# Altium PCB Christmas-2023_Soundboard.PcbDoc
Units mil, origin at the board's own origin, x right, y up, seen from the top; angles counter-clockwise.
Board outline 6800 x 3400 mil, 2 copper layers (Top Layer, Bottom Layer); 187 components, 122 nets, 548 pads, 0 vias.
Unrouted connection lines stored in the file: 360.
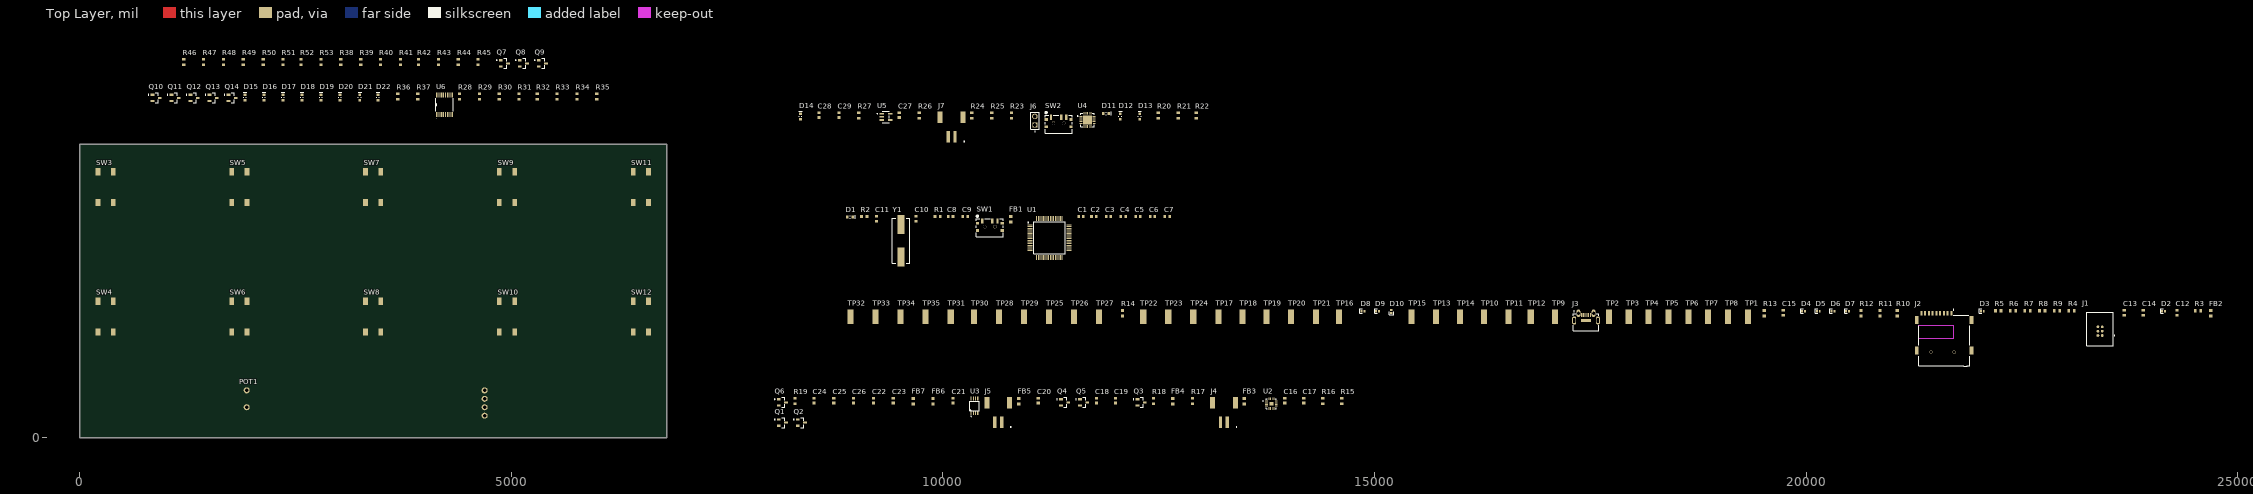
[diagram p0: Top Layer view]
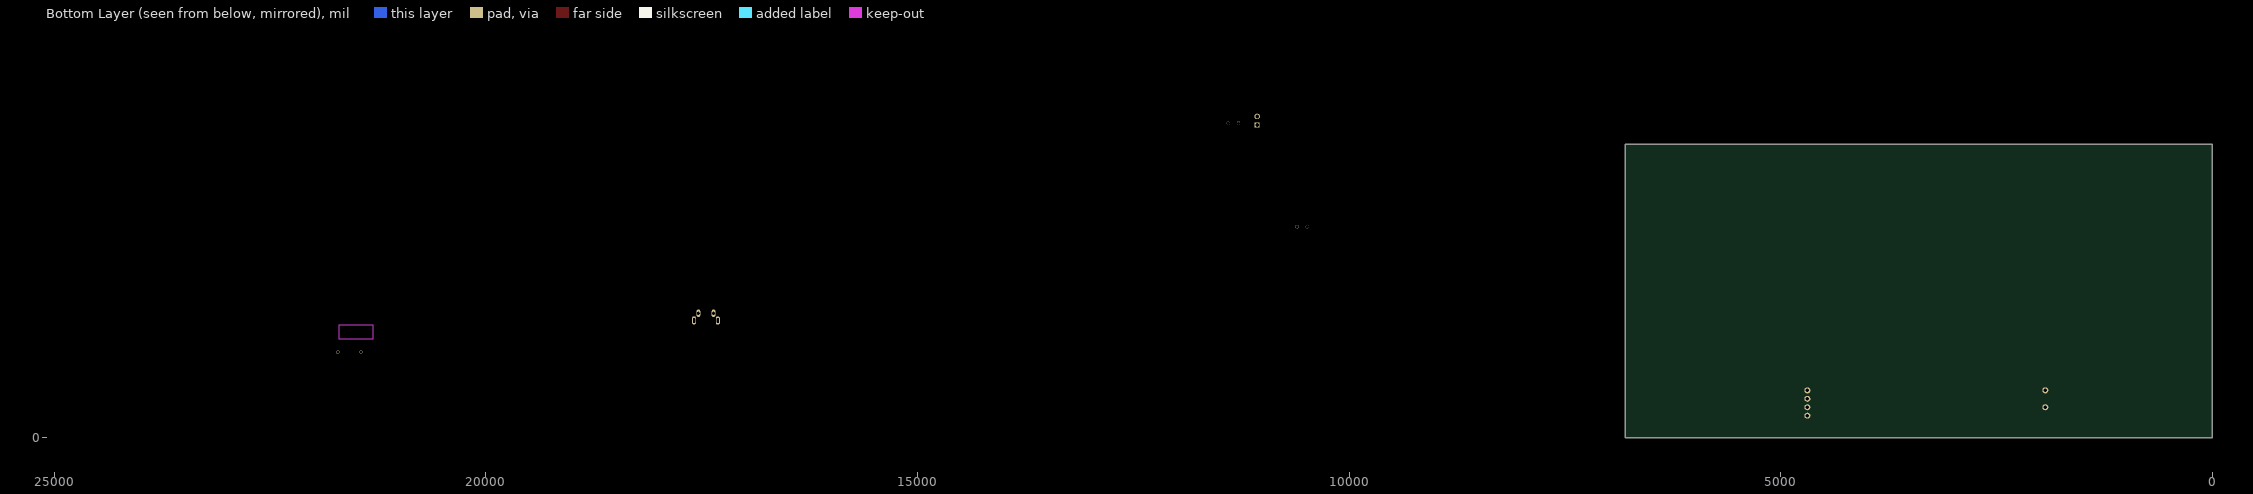
[diagram p1: Bottom Layer view, seen from below]

## Layer stack, top to bottom
Top Solder: solder mask 0.4, Solder Resist, Dk 3.5
Top Layer: signal copper 1.4
Dielectric 1: dielectric 12.6, FR-4, Dk 4.8
Bottom Layer: signal copper 1.4
Bottom Solder: solder mask 0.4, Solder Resist, Dk 3.5

## Board outline
0,0 6800,0 6800,3400 0,3400

## Design rules (kind name [scope] priority, off if disabled: settings)
Clearance "Power Planes" [InNet('+12') vs InNet('VCC')] p1: gap=6 ignorepadtopadclearanceinfootprint=TRUE except(0: Arc-Hole Track-Hole SMDPad-Hole THPad-Hole Via-Hole Fill-Hole Poly-Hole Region-Hole Text-Hole; 10: Arc-Arc Arc-Track Arc-Fill Arc-Poly Arc-Region Track-Track Track-Fill Track-Poly Track-Region Fill-Fill Fill-Poly Fill-Region Poly-Poly Poly-Region Region-Region)
Clearance [All] p2: gap=6 ignorepadtopadclearanceinfootprint=FALSE except(0: Arc-Hole Track-Hole SMDPad-Hole THPad-Hole Via-Hole Fill-Hole Poly-Hole Region-Hole Text-Hole)
DiffPairsRouting [All] p1: maxlimit=10 minlimit=10 mostfreqgap=10 toplayer_minwidth=15 toplayer_maxwidth=15 toplayer_prefwidth=15 bottomlayer_minwidth=15 bottomlayer_maxwidth=15 bottomlayer_prefwidth=15 maxuncoupledlength=500
HoleSize [All] p1: absolutevalues=TRUE maxlimit=106.3 minlimit=6 maxpercent=80.000 minpercent=20.000
MinimumSolderMaskSliver [All] p1: minsoldermaskwidth=0.98
PolygonConnect PolygonConnect_2 [InNet('VCC')] p1: connectstyle=Direct reliefconductorwidth=10 reliefentries=4 polygonreliefangle="90 Angle" airgapwidth=10
PolygonConnect PolygonConnect_1 [InNet('+12')] p2: connectstyle=Direct reliefconductorwidth=10 reliefentries=4 polygonreliefangle="90 Angle" airgapwidth=10
PolygonConnect [All] p3: connectstyle=Relief reliefconductorwidth=10 reliefentries=4 polygonreliefangle="90 Angle" airgapwidth=10
RoomDefinition UI [InComponentClass('UI')] p1: confinementstyle=ConfineIn formatcopy=TRUE lockcomponents=FALSE outline 169.86,5619.71 169.86,5660.06 169.86,5704.71 8378.54,5704.71 8772.3,5704.71 8772.3,5712.88 12413.54,5712.88 12413.54,5712.91 13044.41,5712.91 13044.41,5704.68 13622.7,5704.68 13622.7,5702.17 11938,5702.17 11938,5697.84 6630.14,5697.84 6630.14,5619.71 4800,5619.71 4800,5600 1827.24,5600 1827.24,5619.71
RoomDefinition PWR [InComponentClass('PWR')] p2: confinementstyle=ConfineIn formatcopy=TRUE lockcomponents=FALSE outline 8313.43,3651.93 8313.43,3792.5 9220.5,3792.5 9220.5,3794 11165,3794 11165,3795 11513.2,3795 11513.2,3793.54 11788.54,3793.54 11788.54,3792.5 12316.57,3792.5 12316.57,3791.24 12967.7,3791.24 12967.7,3668.76 12316.57,3668.76 12316.57,3651.93 11788.54,3651.93 11788.54,3566.46 11513.2,3566.46 11513.2,3513.5 10275.42,3513.5 10275.42,3402.1 9924.58,3402.1 9924.58,3636 9220.5,3636 9220.5,3651.93
RoomDefinition MCU [InComponentClass('MCU')] p3: confinementstyle=ConfineIn formatcopy=TRUE lockcomponents=FALSE outline 8855.63,2517.88 8855.63,2591.03 9027.46,2591.03 9027.46,2592.15 10368.7,2592.15 10368.7,2594.45 10716.9,2594.45 10716.9,2592.67 10817.39,2592.67 10817.39,2591.96 12655.02,2591.96 12655.02,2526.95 11509.45,2526.95 11509.45,2038.7 9628.7,2038.7 9628.7,1968.45 9398.7,1968.45 9398.7,2478.13 9196.2,2478.13 9196.2,2517.88
RoomDefinition Connectors-SD [InComponentClass('Connectors-SD')] p4: confinementstyle=ConfineIn formatcopy=TRUE lockcomponents=FALSE outline 8877.68,1296.5 8877.68,1503.5 23179.09,1503.5 23179.09,1503.62 23619.09,1503.62 23619.09,1503.21 24718.69,1503.21 24718.69,1376.79 23619.09,1376.79 23619.09,848.78 21959.09,848.78 21959.09,802.64 21238.31,802.64 21238.31,1215.75 17267.76,1215.75 17267.76,1296.5
RoomDefinition Amplifier [InComponentClass('Amplifier')] p5: confinementstyle=ConfineIn formatcopy=TRUE lockcomponents=FALSE outline 8033.54,94.65 8033.54,485.47 9621.32,485.47 9621.32,485.77 10295.69,485.77 10295.69,487.33 10433.8,487.33 10433.8,486.42 13898.86,486.42 13898.86,483.88 14212.5,483.88 14212.5,483.8 14652.7,483.8 14652.7,361.32 13898.86,361.32 13898.86,298.7 13430.42,298.7 13430.42,94.66 8444.41,94.66 8444.41,94.65
RoutingVias [All] p1: holewidth=11 width=22 viastyle="Through Hole" minholewidth=8 minwidth=16 maxholewidth=28 maxwidth=50
SilkToSolderMaskClearance [IsPad] p1: minsilkscreentomaskgap=3.94 clearancetoexposedcopper=TRUE
SolderMaskExpansion [All] p1: expansion=4 istentingtop=FALSE
UnRoutedNet [All] p1: checkbadconnections=TRUE
Width [All] p1: maxlimit=50 minlimit=6 preferedwidth=16 minimp=50.000000 maximp=50.000000 favimp=50.000000
25 further rules are at their usual default settings.

## Classes and differential pairs
differential pair class DIFF_USB: USB_FS_D
component class UI: D15 D16 D17 D18 D19 D20 D21 D22 POT1 Q7 Q8 Q9 Q10 Q11 Q12 Q13 Q14 R28 R29 R30 R31 R32 R33 R34 R35 R36 R37 R38 R39 R40 R41 R42 R43 R44 R45 R46 R47 R48 R49 R50 R51 R52 R53 SW3 SW4 SW5 SW6 SW7 SW8 SW9 SW10 SW11 SW12 U6
component class PWR: C27 C28 C29 D11 D12 D13 D14 J6 J7 R20 R21 R22 R23 R24 R25 R26 R27 SW2 U4 U5
component class MCU: C1 C2 C3 C4 C5 C6 C7 C8 C9 C10 C11 D1 FB1 R1 R2 SW1 U1 Y1
component class Connectors-SD: C12 C13 C14 C15 D2 D3 D4 D5 D6 D7 D8 D9 D10 FB2 J1 J2 J3 R3 R4 R5 R6 R7 R8 R9 R10 R11 R12 R13 R14 TP1 TP2 TP3 TP4 TP5 TP6 TP7 TP8 TP9 TP10 TP11 TP12 TP13 TP14 TP15 TP16 TP17 TP18 TP19 TP20 TP21 TP22 TP23 TP24 TP25 TP26 TP27 TP28 TP29 TP30 TP31 TP32 TP33 TP34 TP35
component class Amplifier: C16 C17 C18 C19 C20 C21 C22 C23 C24 C25 C26 FB3 FB4 FB5 FB6 FB7 J4 J5 Q1 Q2 Q3 Q4 Q5 Q6 R15 R16 R17 R18 R19 U2 U3
differential pair USB_FS_D: +USB_FS_D_P -USB_FS_D_N

## Components (designator, comment, footprint, x,y, rotation, side; value= is the part's Value field where it differs from the comment)
C1 "CAP" 0603-CAP 11598.7,2559.45 r0 top value=10nF
C2 "CAP" 0603-CAP 11748.7,2559.45 r0 top value=10nF
C3 "CAP" 0603-CAP 11918.7,2559.45 r0 top value=10nF
C4 "CAP" 0603-CAP 12088.7,2559.45 r0 top value=10nF
C5 "CAP" 0603-CAP 12258.7,2559.45 r0 top value=10nF
C6 "CAP" 0603-CAP 12428.7,2559.45 r0 top value=10nF
C7 "CAP" 0603-CAP 12598.7,2559.45 r0 top value=2.2u
C8 "CAP" 0603-CAP 10088.7,2559.45 r0 top value=10nF
C9 "CAP" 0603-CAP 10258.7,2559.45 r0 top value=1uF
C10 "CAP" 0603-CAP 9688.7,2534.45 r90 top
C11 "CAP" 0603-CAP 9228.7,2534.45 r90 top
C12 "CAP" 0603-CAP 24295,1445 r90 top value=2.2u
C13 "CAP" 0603-CAP 23685,1445 r90 top value=0.1u
C14 "CAP" 0603-CAP 23905,1445 r90 top value=2.2u
C15 "CAP" 0603-CAP 19735,1445 r90 top value=0.1u
C16 "CAP" 0603-CAP 13960,427.56 r90 top value=0.1u
C17 "CAP" 0603-CAP 14180,427.56 r90 top value=2.2u
C18 "CAP" 0603-CAP 11780,427.56 r90 top value=220p
C19 "CAP" 0603-CAP 12000,427.56 r90 top value=220p
C20 "CAP" 0603-CAP 11105,427.56 r90 top value=0.1u
C21 "CAP" 0603-CAP 10115,427.56 r90 top value=0.1u
C22 "CAP" 0603-CAP 9195,427.56 r90 top value=220p
C23 "CAP" 0603-CAP 9425,427.56 r90 top value=220p
C24 "CAP" 0603-CAP 8505,427.56 r90 top value=2.2u
C25 "CAP" 0603-CAP 8735,427.56 r90 top value=2.2u
C26 "CAP" 0603-CAP 8965,427.56 r90 top value=0.1u
C27 "CAP" 0603-CAP 9495,3735 r90 top value=4.7u
C28 "CAP" 0603-CAP 8565,3735 r90 top value=4.7u
C29 "CAP" 0603-CAP 8795,3735 r90 top value=4.7u
D1 "LED - single" 0603-LED 8923.7,2554.45 r0 top
D2 "RCLAMP0521P.TCT" RCLAMP0521P.TCT 24140,1465 r0 top
D3 "RCLAMP0521P.TCT" RCLAMP0521P.TCT 22040,1465 r0 top
D4 "RCLAMP0521P.TCT" RCLAMP0521P.TCT 19970,1465 r0 top
D5 "RCLAMP0521P.TCT" RCLAMP0521P.TCT 20140,1465 r0 top
D6 "RCLAMP0521P.TCT" RCLAMP0521P.TCT 20310,1465 r0 top
D7 "RCLAMP0521P.TCT" RCLAMP0521P.TCT 20480,1465 r0 top
D8 "RCLAMP0521P.TCT" RCLAMP0521P.TCT 14865,1465 r0 top
D9 "RCLAMP0521P.TCT" RCLAMP0521P.TCT 15035,1465 r0 top
D10 "RCLAMP0521P.TCT" RCLAMP0521P.TCT 15195,1460 r90 top
D11 "LED - single" 0603-LED 11890,3755 r0 top
D12 "LED - single" 0603-LED 12055,3720 r90 top
D13 "LED - single" 0603-LED 12280,3720 r90 top
D14 "LED - single" 0603-LED 8350,3720 r90 top
D15 "LED - single" 0603-LED 1915,3940 r90 top
D16 "LED - single" 0603-LED 2135,3940 r90 top
D17 "LED - single" 0603-LED 2355,3940 r90 top
D18 "LED - single" 0603-LED 2575,3940 r90 top
D19 "LED - single" 0603-LED 2795,3940 r90 top
D20 "LED - single" 0603-LED 3015,3940 r90 top
D21 "LED - single" 0603-LED 3245,3940 r90 top
D22 "LED - single" 0603-LED 3455,3940 r90 top
FB1 "120 @ 100 MHz" 0603-FB 10783.7,2529.45 r90 top
FB2 "120 @ 100 MHz" 0603-FB 24685,1440 r90 top
FB3 "120 @ 100 MHz" 0603-FB 13490,422.56 r90 top
FB4 "120 @ 100 MHz" 0603-FB 12660,422.56 r90 top
FB5 "120 @ 100 MHz" 0603-FB 10880,422.56 r90 top
FB6 "120 @ 100 MHz" 0603-FB 9885,422.56 r90 top
FB7 "120 @ 100 MHz" 0603-FB 9655,422.56 r90 top
J1 "TC2030-IDC" "TAG CONNECT TC2030IDC" 23405,1220 r90 top
J2 "MEM2075-00-140-01-A" GCT_MEM2075-00-140-01-A 21580,990 r0 top
J3 "UJ2-MIBH2-4-SMT-TR" "USB MICRO CONN TH" 17450,1335 r0 top
J4 "S2B-PH-SM4-TB" JST_PH-2POS-SMT-RA 13255,177.56 r0 top
J5 "S2B-PH-SM4-TB" JST_PH-2POS-SMT-RA 10640,177.56 r0 top
J6 "HEADER 2POS MALE TH" "2-pos, 0.1\" TH header" 11065,3670 r90 top
J7 "S2B-PH-SM4-TB" JST_PH-2POS-SMT-RA 10100,3485 r0 top
POT1 "PT6WV-471A2020" "BIG SLIDE POT" 4100,400 r90 top value=10k
Q1 "PMOS" SOT-23 8140,172.56 r0 top
Q2 "PMOS" SOT-23 8360,172.56 r0 top
Q3 "NMOS" SOT-23 12295,407.56 r0 top
Q4 "NMOS" SOT-23 11410,407.56 r0 top
Q5 "NMOS" SOT-23 11630,407.56 r0 top
Q6 "NMOS" SOT-23 8140,407.56 r0 top
Q7 "NMOS" SOT-23 4920,4335 r0 top
Q8 "NMOS" SOT-23 5140,4335 r0 top
Q9 "NMOS" SOT-23 5360,4335 r0 top
Q10 "NMOS" SOT-23 885,3935 r0 top
Q11 "NMOS" SOT-23 1105,3935 r0 top
Q12 "NMOS" SOT-23 1325,3935 r0 top
Q13 "NMOS" SOT-23 1545,3935 r0 top
Q14 "NMOS" SOT-23 1765,3935 r0 top
R1 "RES" 0603-RES 9938.7,2559.45 r0 top value=10k
R2 "RES" 0603-RES 9088.7,2559.45 r0 top value=1k
R3 "RES" 0603-RES 24540,1470 r0 top value=49
R4 "RES" 0603-RES 23075,1470 r0 top value=49
R5 "RES" 0603-RES 22225,1470 r0 top value=10k
R6 "RES" 0603-RES 22395,1470 r0 top value=10k
R7 "RES" 0603-RES 22565,1470 r0 top value=10k
R8 "RES" 0603-RES 22735,1470 r0 top value=10k
R9 "RES" 0603-RES 22905,1470 r0 top value=10k
R10 "RES" 0603-RES 21055,1440 r90 top value=49
R11 "RES" 0603-RES 20855,1440 r90 top value=22
R12 "RES" 0603-RES 20635,1440 r90 top value=49
R13 "RES" 0603-RES 19515,1440 r90 top value=1M
R14 "RES" 0603-RES 12080,1440 r90 top value=DNS
R15 "RES" 0603-RES 14620,422.56 r90 top value=100k
R16 "RES" 0603-RES 14400,422.56 r90 top value=690k
R17 "RES" 0603-RES 12890,422.56 r90 top value=DNS
R18 "RES" 0603-RES 12440,422.56 r90 top value=100k
R19 "RES" 0603-RES 8285,422.56 r90 top value=10k
R20 "RES" 0603-RES 12495,3730 r90 top value=470
R21 "RES" 0603-RES 12725,3730 r90 top value=470
R22 "RES" 0603-RES 12935,3730 r90 top value=470
R23 "RES" 0603-RES 10795,3730 r90 top value=10k
R24 "RES" 0603-RES 10335,3730 r90 top value=2k
R25 "RES" 0603-RES 10565,3730 r90 top value=15k
R26 "RES" 0603-RES 9725,3730 r90 top value=15k
R27 "RES" 0603-RES 9025,3730 r90 top value=1k
R28 "RES" 0603-RES 4400,3950 r90 top value=470
R29 "RES" 0603-RES 4630,3950 r90 top value=470
R30 "RES" 0603-RES 4860,3950 r90 top value=470
R31 "RES" 0603-RES 5090,3950 r90 top value=470
R32 "RES" 0603-RES 5300,3950 r90 top value=470
R33 "RES" 0603-RES 5530,3950 r90 top value=470
R34 "RES" 0603-RES 5760,3950 r90 top value=470
R35 "RES" 0603-RES 5990,3950 r90 top value=470
R36 "RES" 0603-RES 3685,3950 r90 top value=10k
R37 "RES" 0603-RES 3915,3950 r90 top value=10k
R38 "RES" 0603-RES 3025,4350 r90 top value=470
R39 "RES" 0603-RES 3255,4350 r90 top value=470
R40 "RES" 0603-RES 3485,4350 r90 top value=470
R41 "RES" 0603-RES 3715,4350 r90 top value=470
R42 "RES" 0603-RES 3925,4350 r90 top value=470
R43 "RES" 0603-RES 4155,4350 r90 top value=470
R44 "RES" 0603-RES 4385,4350 r90 top value=470
R45 "RES" 0603-RES 4615,4350 r90 top value=470
R46 "RES" 0603-RES 1205,4350 r90 top value=10k
R47 "RES" 0603-RES 1435,4350 r90 top value=10k
R48 "RES" 0603-RES 1665,4350 r90 top value=10k
R49 "RES" 0603-RES 1895,4350 r90 top value=10k
R50 "RES" 0603-RES 2125,4350 r90 top value=10k
R51 "RES" 0603-RES 2355,4350 r90 top value=10k
R52 "RES" 0603-RES 2565,4350 r90 top value=10k
R53 "RES" 0603-RES 2795,4350 r90 top value=10k
SW1 "CUS-12TB" CUS-12TB_NDC 10543.7,2429.45 r0 top
SW2 "CUS-12TB" CUS-12TB_NDC 11340,3630 r0 top
SW3 "SPDT SMT Tactile Push Button Switch" "TACTILE SWITCH" 300,2900 r0 top
SW4 "SPDT SMT Tactile Push Button Switch" "TACTILE SWITCH" 300,1400 r0 top
SW5 "SPDT SMT Tactile Push Button Switch" "TACTILE SWITCH" 1850,2900 r0 top
SW6 "SPDT SMT Tactile Push Button Switch" "TACTILE SWITCH" 1850,1400 r0 top
SW7 "SPDT SMT Tactile Push Button Switch" "TACTILE SWITCH" 3400,2900 r0 top
SW8 "SPDT SMT Tactile Push Button Switch" "TACTILE SWITCH" 3400,1400 r0 top
SW9 "SPDT SMT Tactile Push Button Switch" "TACTILE SWITCH" 4950,2900 r0 top
SW10 "SPDT SMT Tactile Push Button Switch" "TACTILE SWITCH" 4950,1400 r0 top
SW11 "SPDT SMT Tactile Push Button Switch" "TACTILE SWITCH" 6500,2900 r0 top
SW12 "SPDT SMT Tactile Push Button Switch" "TACTILE SWITCH" 6500,1400 r0 top
TP1 "RCWCTE" RCWCTE 19325,1400 r90 top
TP2 "RCWCTE" RCWCTE 17715,1400 r90 top
TP3 "RCWCTE" RCWCTE 17945,1400 r90 top
TP4 "RCWCTE" RCWCTE 18175,1400 r90 top
TP5 "RCWCTE" RCWCTE 18405,1400 r90 top
TP6 "RCWCTE" RCWCTE 18635,1400 r90 top
TP7 "RCWCTE" RCWCTE 18865,1400 r90 top
TP8 "RCWCTE" RCWCTE 19095,1400 r90 top
TP9 "RCWCTE" RCWCTE 17090,1400 r90 top
TP10 "RCWCTE" RCWCTE 16270,1400 r90 top
TP11 "RCWCTE" RCWCTE 16550,1400 r90 top
TP12 "RCWCTE" RCWCTE 16810,1400 r90 top
TP13 "RCWCTE" RCWCTE 15710,1400 r90 top
TP14 "RCWCTE" RCWCTE 15990,1400 r90 top
TP15 "RCWCTE" RCWCTE 15430,1400 r90 top
TP16 "RCWCTE" RCWCTE 14590,1400 r90 top value=DNS
TP17 "RCWCTE" RCWCTE 13190,1400 r90 top
TP18 "RCWCTE" RCWCTE 13470,1400 r90 top
TP19 "RCWCTE" RCWCTE 13750,1400 r90 top
TP20 "RCWCTE" RCWCTE 14030,1400 r90 top
TP21 "RCWCTE" RCWCTE 14320,1400 r90 top
TP22 "RCWCTE" RCWCTE 12320,1400 r90 top value=DNS
TP23 "RCWCTE" RCWCTE 12610,1400 r90 top value=DNS
TP24 "RCWCTE" RCWCTE 12900,1400 r90 top value=DNS
TP25 "RCWCTE" RCWCTE 11230,1400 r90 top
TP26 "RCWCTE" RCWCTE 11520,1400 r90 top
TP27 "RCWCTE" RCWCTE 11810,1400 r90 top
TP28 "RCWCTE" RCWCTE 10650,1400 r90 top value=DNS
TP29 "RCWCTE" RCWCTE 10940,1400 r90 top value=DNS
TP30 "RCWCTE" RCWCTE 10360,1400 r90 top value=DNS
TP31 "RCWCTE" RCWCTE 10090,1400 r90 top value=DNS
TP32 "RCWCTE" RCWCTE 8930,1400 r90 top
TP33 "RCWCTE" RCWCTE 9220,1400 r90 top
TP34 "RCWCTE" RCWCTE 9510,1400 r90 top value=DNS
TP35 "RCWCTE" RCWCTE 9800,1400 r90 top value=DNS
U1 "STM32F103RCT6" LQFP-48 11233.7,2314.45 r0 top
U2 "MAX98357AETE+T" "16-WFQFN EXPOSED PAD" 13805,392.56 r0 top
U3 "PAM8304ASR" 8-TSSOP 10365,367.56 r0 top
U4 "MCP73871-2CCI/ML" "20-VFQFN EXPOSED PAD" 11675,3680 r0 top
U5 "XC6210B332MR-G" SOT-25-5 9340,3715 r0 top
U6 "74HC595PW,118" 16-TSSOP 4225,3855 r90 top
Y1 "XTAL-OSC" ABLS-12.000MHZ-B2-T 9513.7,2279.45 r90 top

## Footprints (in the part's own frame and the unit in brackets; to place one, negate y for a bottom-side part, rotate by r counter-clockwise, add the part's x,y. Pads: shape width x height; smd on the part's side, far side on the other; paste and mask are expansions set on the pad)
"2-pos, 0.1\" TH header" [mm]
  rect 1.45x1.45 / inner round 1.45 / far side rect 1.45x1.45 hole 1.1: 1(-1.27,0)
  round 1.6 hole 1.1: 2(1.27,0)
  silkscreen extent -3.29,-1.27 2.54,1.27, body extent -2.57,-1.26 2.51,1.28, height 8.57
8-TSSOP [mm]
  rect 0.3x1.2 smd mask+0.076: 1(-0.976,-2.113) 2(-0.326,-2.113) 3(0.324,-2.113) 4(0.974,-2.113) 5(0.974,2.112) 6(0.324,2.112) 7(-0.326,2.112) 8(-0.976,2.112)
  silkscreen extent -1.4,-3.15 1.4,1.4, body extent -1.51,-2.45 1.49,2.45, height 1.1
16-TSSOP [mil]
  rect 58x14 smd: 1(-115,90) 2(-115,64) 3(-115,38) 4(-115,13) 5(-115,-13) 6(-115,-38) 7(-115,-64) 8(-115,-90) 9(115,-90) 10(115,-64) 11(115,-38) 12(115,-13) 13(115,13) 14(115,38) 15(115,64) 16(115,90)
  silkscreen extent -162,-100 74,100, body extent -126,-98 126,98, height 43
"16-WFQFN EXPOSED PAD" [mm]
  rrect25% 0.84x0.27 smd mask+0.051: 1(-1.435,0.75) 2(-1.435,0.25) 3(-1.435,-0.25) 4(-1.435,-0.75) 9(1.435,-0.75) 10(1.435,-0.25) 11(1.435,0.25) 12(1.435,0.75)
  rrect25% 0.27x0.84 smd mask+0.051: 5(-0.75,-1.435) 6(-0.25,-1.435) 7(0.25,-1.435) 8(0.75,-1.435) 13(0.75,1.435) 14(0.25,1.435) 15(-0.25,1.435) 16(-0.75,1.435)
  rect 1.1x1.1 smd paste-0.2 mask+0.051: 17(0,0)
  silkscreen extent -2.57,-1.5 1.5,1.5, body extent -1.55,-1.55 1.55,1.55, height 0.8
"20-VFQFN EXPOSED PAD" [mm]
  rrect50% 0.84x0.26 smd mask+0.051: 1(-1.935,1) 2(-1.935,0.5) 3(-1.935,0) 4(-1.935,-0.5) 5(-1.935,-1) 11(1.935,-1) 12(1.935,-0.5) 13(1.935,0) 14(1.935,0.5) 15(1.935,1)
  rrect50% 0.26x0.84 smd mask+0.051: 6(-1,-1.935) 7(-0.5,-1.935) 8(0,-1.935) 9(0.5,-1.935) 10(1,-1.935) 16(1,1.935) 17(0.5,1.935) 18(0,1.935) 19(-0.5,1.935) 20(-1,1.935)
  rect 2.7x2.7 smd paste-2 mask+0.051: 21(0,0)
  silkscreen extent -3,-2 2,2, body extent -2,-2 2,2, height 1
0603-CAP [mm]
  rect 0.75x0.94 smd: 1(-0.7,0) 2(0.7,0)
  body extent -0.8,-0.4 0.8,0.4, height 0.9
0603-FB [mm]
  rect 0.9x1 smd: 1(-0.8,0) 2(0.8,0)
  body extent -0.8,-0.47 0.8,0.48, height 0.81
0603-LED [mm]
  rect 0.8x0.8 smd: 1(-0.8,0) 2(0.8,0)
  silkscreen extent -0.08,-0.51 1.52,0.51, body extent -0.8,-0.35 0.8,0.35, height 0.7
0603-RES [mm]
  rect 0.8x0.95 smd: 1(-0.8,0) 2(0.8,0)
  body extent -0.8,-0.4 0.8,0.4, height 0.55
ABLS-12.000MHZ-B2-T [mil]
  rect 220x83 smd: 1(-187,0) 2(187,0)
  silkscreen extent -260,-100 260,100, body extent -250,-93 250,93, height 166
"BIG SLIDE POT" [mil] "PTL60-15R0-103B2"
  round 70 hole 43: B(147,2165.5) CTRL(-147,-590.5) E(147,-590.5) IN(-49,-590.5) L(49,-590.5) OUT(-49,2165.5)
  body extent -177,-690 177,2263, height 906
CUS-12TB_NDC [mil]
  rect 28x59 smd paste+0 mask+0: 1(-88.58,80.78) 2(29.53,80.78) 3(88.58,80.78)
  round 37 / inner round 60 / far side round 37 hole 37 unplated paste-18.5 mask-18.5: 4(-59.06,11.89) 5(59.06,11.89)
  rect 39x32 smd paste-19.5 mask-19.5: 6(-143.7,53.22) 7(143.7,53.22) 8(-143.7,-29.45) 9(143.7,-29.45)
  silkscreen extent -156,-104 156,145, body extent -152,-97 152,100, height 55
GCT_MEM2075-00-140-01-A [mm]
  rect 0.62x1.4 smd: 1(2.58,11.42) 2(1.48,11.42) 3(0.38,11.42) 4(-0.72,11.42) 5(-1.82,11.42) 6(-2.92,11.42) 7(-4.02,11.42) 8(-5.12,11.42) 9(-6.22,11.42)
  rect 1.1x2.4 smd: SH1(-7.6,0.42) SH2(-7.6,9.42) SH3(8.55,9.42) SH4(8.55,0.42)
  round 0.95 hole 0.95 unplated: ""(-3.4,0) ""(3.4,0)
  Keep-Out Layer region: 3.15,3.87 -7.05,3.87 -7.05,7.92 3.15,7.92
  silkscreen extent -7.05,-4.23 8,12.62, body extent -7.74,-4.24 8.7,11.61, height 1.45
JST_PH-2POS-SMT-RA [mm]
  rect 1x3.5 smd: 1(1,0) 2(-1,0)
  rect 1.5x3.4 smd: P1(3.35,5.75) P2(-3.35,5.75)
  silkscreen extent 3.56,-1.52 3.81,-1.27
LQFP-48 [mm]
  rect 1.475x0.3 smd mask+0.051: 1(-5.738,3.75) 2(-5.738,3.25) 3(-5.738,2.75) 4(-5.738,2.25) 5(-5.738,1.75) 6(-5.738,1.25) 7(-5.738,0.75) 8(-5.738,0.25) 9(-5.738,-0.25) 10(-5.738,-0.75) 11(-5.738,-1.25) 12(-5.738,-1.75) 13(-5.738,-2.25) 14(-5.738,-2.75) 15(-5.738,-3.25) 16(-5.738,-3.75) 33(5.738,-3.75) 34(5.738,-3.25) 35(5.738,-2.75) 36(5.738,-2.25) 37(5.738,-1.75) 38(5.738,-1.25) 39(5.738,-0.75) 40(5.738,-0.25) 41(5.738,0.25) 42(5.738,0.75) 43(5.738,1.25) 44(5.738,1.75) 45(5.738,2.25) 46(5.738,2.75) 47(5.738,3.25) 48(5.738,3.75)
  rect 0.3x1.475 smd mask+0.051: 17(-3.75,-5.738) 18(-3.25,-5.738) 19(-2.75,-5.738) 20(-2.25,-5.738) 21(-1.75,-5.738) 22(-1.25,-5.738) 23(-0.75,-5.738) 24(-0.25,-5.738) 25(0.25,-5.738) 26(0.75,-5.738) 27(1.25,-5.738) 28(1.75,-5.738) 29(2.25,-5.738) 30(2.75,-5.738) 31(3.25,-5.738) 32(3.75,-5.738) 49(3.75,5.738) 50(3.25,5.738) 51(2.75,5.738) 52(2.25,5.738) 53(1.75,5.738) 54(1.25,5.738) 55(0.75,5.738) 56(0.25,5.738) 57(-0.25,5.738) 58(-0.75,5.738) 59(-1.25,5.738) 60(-1.75,5.738) 61(-2.25,5.738) 62(-2.75,5.738) 63(-3.25,5.738) 64(-3.75,5.738)
  silkscreen extent -6.35,-4.65 4.65,4.65, body extent -6,-6 6,6, height 1.6
RCLAMP0521P.TCT [mil]
  rect 22x30 smd paste+0 mask+2: A(17,0) K(-16.5,0)
  silkscreen extent -35,-25 -5,25, body extent -21,-14 21,14, height 22
RCWCTE [mm]
  rect 4.2x1.8 smd: 1(0,0)
  body extent -1.6,-0.8 1.6,0.8, height 2.01
SOT-23 [mm]
  rect 1.09x0.61 smd: 1(-1.07,0.915) 2(-1.07,-0.915) 3(1.07,0)
  silkscreen extent -2.35,-1.45 0.65,1.45, body extent -1.2,-1.45 1.2,1.45, height 1.2
SOT-25-5 [mil]
  rect 52x20 smd paste+0: 1(-51,37.4) 2(-51,0) 3(-51,-37.4) 4(51,-37.4) 5(51,37.4)
  silkscreen extent -102,-66 40,66, body extent -55,-57 55,57, height 51
"TACTILE SWITCH" [mm] "From Sinking clock brain PCB"
  rect 1.4x2.1 smd: 1(-2.25,-4.55) 2(-2.25,4.55) 3(2.25,-4.55) 4(2.25,4.55)
  body extent -3.04,-5.02 2.96,4.98, height 9.55
"TAG CONNECT TC2030IDC" [mil]
  round 30.83 smd: 1(-37.52,-25) 2(-37.52,25) 3(12.48,-25) 4(12.48,25) 5(62.52,-25) 6(62.52,25)
  round 48.25 hole 96.5 unplated: 7(-87.52,-100) 9(-87.52,100) 10(37.48,-100) 11(37.48,100)
  round 21 hole 42.01 unplated: 8(-87.52,0) 12(112.48,-40) 13(112.48,40)
  silkscreen extent -157,-167 232,154, body extent -361,-204 209,216, height 5920
"USB MICRO CONN TH" [mm] "CUI_UJ2-MIBH2-4-SMT-TR"
  rect 0.4x1.2 smd: 1(-1.3,2.1) 2(-0.65,2.1) 3(0,2.1) 4(0.65,2.1) 5(1.3,2.1)
  oval 1.2x2.4 hole 0.6 slot 1.4 at 90 deg: SH1(-3.5,0.55) SH4(3.5,0.55)
  oval 1.1x2.2 hole 0.65 slot 0.8 at 90 deg: SH2(-2.225,2.65) SH3(2.225,2.65)
  rect 3x0.9 smd: SH5(0,0.55)
  silkscreen extent -3.75,-2.5 3.75,3.36, body extent -3.74,-2.41 3.76,2.88, height 2.77

## Part data
C1 C2 C3 C4 C5 C6 C7 C8 C9 C10 C11 C12 C13 C14 C15 C16 C17 C18 C19 C20 C21 C22 C23 C24 C25 C26 C27 C28 C29: "Capaicitor"
D1 D11: "LED", Color=Yellow
D2 D3 D4 D5 D6 D7 D8 D9 D10: library part "TVS DIODE", "25V Clamp 4A (8/20µs) Ipp Tvs Diode Surface Mount SLP1006P2", MFR="Semtech Corporation", MFR PN=RCLAMP0521P.TCT, Type=SMD
D12 D16 D18 D20 D22: "LED", Color=Red
D13 D14 D15 D17 D19 D21: "LED", Color=Green
FB1 FB2 FB3 FB4 FB5 FB6 FB7: library part "FERRITE BEAD", MFR="Pulse Electronics", MFR PN=PE-0603PFB121ST, Type=SMD
J1: library part "TAG CONNECT POGO HEADER", "\"Plug of Nails\" POGO Pin connector", MFR=Tag-Connect, MFR PN=TC2030-IDC
J2: library part SD-CONN-SMD, "10 (8 + 2) Position Card Connector Secure Digital - microSDâ„¢ Surface Mount, Right Angle Gold", MFR=GCT, MFR PN=MEM2075-00-140-01-A, Type=SMD
J3: library part "Micro USB Port", "Micro B, USB 2.0, 1.8 A, Right Angle, Surface Mount (SMT), USB Receptacle", MFR="CUI Devices", MFR PN=UJ2-MIBH2-4-SMT-TR
J4 J5 J7: library part "JST CONN 2POS PH", "Connector Header Surface Mount, Right Angle 2 position 0.079 (2.00mm)", MFR="JST Sales", MFR PN=S2B-PH-SM4-TB, Type=SMD
POT1: library part POT, "POT 470 OHM 1/10W CARBON LINEAR", MFR="Bourns Inc.", MFR PN=PTL60-15R0-103B2
Q1 Q2: "P-Channel MOSFET", MFR="Diodes Incorporated", MFR PN=BSS84-7-F, Type=SMD
Q3 Q4 Q5 Q6 Q7 Q8 Q9 Q10 Q11 Q12 Q13 Q14: "N-Channel MOSFET", MFR="Diodes Incorporated", MFR PN=DMN63D8L, Type=SMD
R1 R2 R3 R4 R5 R6 R7 R8 R9 R10 R11 R12 R13 R14 R15 R16 R17 R18 R19 R20 R21 R22 R23 R24 R25 R26 R27 R28 R29 R30 R31 R32 R33 R34 R35 R36 R37 R38 R39 R40 R41 R42 R43 R44 R45 R46 R47 R48 R49 R50 R51 R52 R53: "Resistor", Type=SMD
SW1 SW2: library part "SPDT SLIDE SWITCH", "No Description Available", MFR="Nidec Copal Electronics", MFR PN=CUS-12TB, Type=SMD
TP1 TP2 TP3 TP4 TP5 TP6 TP7 TP8 TP9 TP10 TP11 TP12 TP13 TP14 TP15 TP16 TP17 TP18 TP19 TP20 TP21 TP22 TP23 TP24 TP25 TP26 TP27 TP28 TP29 TP30 TP31 TP32 TP33 TP34 TP35: library part "Test Point", "Test Point, Surface Mount", MFR="KOA Speer Electronics, Inc.", MFR PN=RCWCTE
U1: "STM32F103RCT6, 32 bit ARM Cortex M3 Microcontroller 72MHz 256 kB Flash, 48 kB RAM, USB CAN I2C 64-Pin LQFP", MFR=STMicroelectronics, MFR PN=STM32F103RCT6, Type=SMD
U2: "I2S Audio DAC and amp", MFR="Analog Devices", MFR PN=MAX98357AETE+T, Type=SMD
U3: library part "AMP 3W ANALOG", "Amplifier IC 1-Channel (Mono) Class D 8L-MSOP", MFR="Diodes Inc.", MFR PN=PAM8304ASR, Type=SMD
U4: library part "LiPo Batt Charger - Shared load", "Charger IC Lithium Ion/Polymer 20-QFN (4x4)", MFR="Microchip Technology", MR PN=MCP73871-2CCI/ML, Type=SMD
U5: library part "LDO 3.3V FIXED 700mA", "No Description Available", MFR="Torex Semiconductor", MFR PN=XC6210B332MR-G, Type=SMD
U6: library part "SHIFT REGISTER 8 BIT", "Shift Shift Register 1 Element 8 Bit 16-TSSOP", MFR="Nexperia USA Inc.", MFR PN=74HC595PW,118, Type=SMD
Y1: "SMD Tuning Fork Crystal", MFR="Abracon LLC", MFR PN=ABLS-12.000MHZ-B2-T

## Nets (pads, with @x,y where several pads share a name; then routed paths per layer and width w, separated by ;. In a path a pad name is that pad's centre, name@x,y a point inside that pad or via, vN(x,y) a via of type N, cw(c..) or ccw(c..) an arc to the next point about the centre after c; other vN are vias at no path point)
+5_USB: D8.K J3.1 R20.2 R21.2 R22.2 SW2.1 TP17.1 U4.2 U4.9 U4.17 U4.18 U4.19
ADAC_SD: Q6.1 TP33.1 U1.17
ADC_IN1: POT1.CTRL TP30.1 U1.15
BOOT0: R1.2 SW1.2 U1.60
BUTTON_1: SW3.1 U1.55
BUTTON_2: SW5.1 U1.56
BUTTON_3: SW7.1 U1.57
BUTTON_4: SW9.1 U1.61
BUTTON_5: SW11.1 U1.62
BUTTON_6: SW4.1 U1.43
BUTTON_7: SW6.1 U1.42
BUTTON_8: SW8.1 U1.41
BUTTON_9: SW10.1 U1.23
BUTTON_10: SW12.1 U1.24
DAC_OUT1: C20.1 U1.20
GAIN_3DB: Q1.1 TP22.1 U1.8
GAIN_6DB: Q2.1 TP23.1 U1.9
GAIN_12DB: Q4.1 TP16.1 U1.10
GAIN_15DB: Q5.1 TP24.1 U1.11
GND: C1.1 C2.1 C3.1 C4.1 C5.1 C6.1 C7.1 C8.1 C9.1 C10.2 C11.2 C15.1 C16.1 C17.1 C18.1 C19.1 C21.1 C22.1 C23.1 C24.1 C25.1 C26.1 C27.2 C28.1 C29.2 D1.2 D3.A D4.A D5.A D6.A D7.A D8.A D9.A D10.A D14.2 J1.6 J2.6 J2.SH1 J2.SH2 J2.SH3 J2.SH4 J3.5 J7.2 POT1.OUT Q3.2 Q4.2 Q5.2 Q6.2 Q7.2 Q8.2 Q9.2 Q10.2 Q11.2 Q12.2 Q13.2 Q14.2 R1.1 R13.1 R14.1 R23.1 R24.2 R25.1 R26.1 R46.1 R47.1 R48.1 R49.1 R50.1 R51.1 R52.1 R53.1 SW3.2 SW4.2 SW5.2 SW6.2 SW7.2 SW8.2 SW9.2 SW10.2 SW11.2 SW12.2 TP26.1 TP27.1 U1.12 U1.18 U1.31 U1.47 U1.63 U2.3 U2.11 U2.15 U2.17 U3.7 U4.3 U4.10 U4.11 U4.21 U5.2 U6.8
I2S2_CLK: TP9.1 U1.34 U2.16
I2S2_DATA: TP1.1 U1.36 U2.1
I2S2_WS: TP15.1 U1.33 U2.14
I2S_AMP_SD: Q3.1 TP32.1 U1.16
NetC8_2: C8.2 FB1.1 U1.13
NetC12_1: C12.1 C13.1 C14.1 D2.A
NetC18_2: C18.2 FB4.2 J4.2
NetC19_2: C19.2 FB3.2 J4.1
NetC20_2: C20.2 U3.5
NetC21_2: C21.2 U3.4
NetC22_2: C22.2 FB6.2 J5.2
NetC23_2: C23.2 FB5.2 J5.1
NetD1_1: D1.1 R2.1
NetD11_1: D11.1 R20.1
NetD11_2: D11.2 U4.6
NetD12_1: D12.1 R21.1
NetD12_2: D12.2 U4.8
NetD13_1: D13.1 R22.1
NetD13_2: D13.2 U4.7
NetD14_1: D14.1 R27.1
NetD15_1: D15.1 R28.1
NetD15_2: D15.2 Q7.3
NetD16_1: D16.1 R29.1
NetD16_2: D16.2 Q8.3
NetD17_1: D17.1 R30.1
NetD17_2: D17.2 Q9.3
NetD18_1: D18.1 R31.1
NetD18_2: D18.2 Q10.3
NetD19_1: D19.1 R32.1
NetD19_2: D19.2 Q11.3
NetD20_1: D20.1 R33.1
NetD20_2: D20.2 Q12.3
NetD21_1: D21.1 R34.1
NetD21_2: D21.2 Q13.3
NetD22_1: D22.1 R35.1
NetD22_2: D22.2 Q14.3
NetFB3_1: FB3.1 U2.10
NetFB4_1: FB4.1 U2.9
NetFB5_1: FB5.1 U3.1
NetFB6_1: FB6.1 U3.8
NetJ1_2: J1.2 R3.1
NetJ1_3: J1.3 R4.1
NetJ1_4: J1.4 R10.1
NetJ1_5: J1.5 R12.1
NetJ2_5: J2.5 R11.2
NetJ3_SH1: J3.SH1 J3.SH2 J3.SH3 J3.SH4 J3.SH5 R14.2
NetJ6_2: J6.2 U4.1 U4.20
NetQ1_2: Q1.2 R15.1
NetQ1_3: Q1.3 Q2.3 Q4.3 R17.1 R18.2
NetQ3_3: Q3.3 R16.1 U2.4
NetQ5_3: Q5.3 R18.1
NetQ6_3: Q6.3 R19.1 U3.6
NetQ7_1: Q7.1 R38.1 R46.2
NetQ8_1: Q8.1 R39.1 R47.2
NetQ9_1: Q9.1 R40.1 R48.2
NetQ10_1: Q10.1 R41.1 R49.2
NetQ11_1: Q11.1 R42.1 R50.2
NetQ12_1: Q12.1 R43.1 R51.2
NetQ13_1: Q13.1 R44.1 R52.2
NetQ14_1: Q14.1 R45.1 R53.2
NetR2_2: R2.2 U1.25
NetR17_2: R17.2 U2.2
NetR23_2: R23.2 SW2.2 U4.4
NetR24_1: R24.1 U4.13
NetR25_2: R25.2 U4.12
NetR26_2: R26.2 U4.5
NJTRST: TP14.1 U1.22
NRST: C15.2 D7.K R12.2 TP13.1 U1.7
RCC_OSC_IN: C10.1 U1.5 Y1.2
RCC_OSC_OUT: C11.1 U1.6 Y1.1
SDIO_CARD_DETECT: J2.9 R13.2 TP11.1 U1.38
SDIO_CLK: R11.1 TP10.1 U1.53
SDIO_CMD: J2.3 R9.1 TP12.1 U1.54
SDIO_D0: J2.7 R8.1 TP5.1 U1.40
SDIO_D1: J2.8 R7.1 TP6.1 U1.39
SDIO_D2: J2.1 R6.1 TP7.1 U1.51
SDIO_D3: J2.2 R5.1 TP8.1 U1.52
SHIFT_DATA_CLK: TP34.1 U1.28 U6.11
SHIFT_DATA_OUT: TP28.1 U1.27 U6.14
SHIFT_MCLR: R37.1 TP31.1 U1.30 U6.10
SHIFT_OE_PWM: R36.1 TP29.1 U1.26 U6.13
SHIFT_STORE_CLK: TP35.1 U1.29 U6.12
SWD_CLK: D5.K R4.2 TP3.1 U1.49
SWD_IO: D4.K R3.2 TP2.1 U1.46
SWO: D6.K R10.2 TP4.1 U1.50
USART1_RX: TP21.1 U1.59
USART1_TX: TP20.1 U1.58
USB_FS_D_N: D9.K J3.2 U1.44
USB_FS_D_P: D10.K J3.3 U1.45
VBATT: C16.2 C17.2 C24.2 C28.2 FB7.1 J6.1 Q2.2 R15.2 R16.2 TP19.1 U2.7 U2.8 U5.1 U5.3
VBATT_ADAC: C25.2 C26.2 FB7.2 R19.2 U3.2 U3.3
VBATT_SENSE: C27.1 J7.1 TP18.1 U4.14 U4.15 U4.16
VDD: C1.2 C2.2 C3.2 C4.2 C5.2 C6.2 C7.2 C9.2 C12.2 C29.1 D3.K FB1.2 FB2.2 J1.1 POT1.IN R5.2 R6.2 R7.2 R8.2 R9.2 R27.2 R28.2 R29.2 R30.2 R31.2 R32.2 R33.2 R34.2 R35.2 R36.2 R37.2 SW1.1 TP25.1 U1.1 U1.19 U1.32 U1.48 U1.64 U5.5 U6.16
VDD_SD: C13.2 C14.2 D2.K FB2.1 J2.4
VOL_LED_1: R38.2 U6.15
VOL_LED_2: R39.2 U6.1
VOL_LED_3: R40.2 U6.2
VOL_LED_4: R41.2 U6.3
VOL_LED_5: R42.2 U6.4
VOL_LED_6: R43.2 U6.5
VOL_LED_7: R44.2 U6.6
VOL_LED_8: R45.2 U6.7
pads on no net: J1.7 J1.8 J1.9 J1.10 J1.11 J1.12 J1.13 J2. J3.4 J4.P1 J4.P2 J5.P1 J5.P2 J7.P1 J7.P2 POT1.B POT1.E POT1.L SW1.3 SW1.4 SW1.5 SW1.6 SW1.7 SW1.8 SW1.9 SW2.3 SW2.4 SW2.5 SW2.6 SW2.7 SW2.8 SW2.9 SW3.3 SW3.4 SW4.3 SW4.4 SW5.3 SW5.4 SW6.3 SW6.4 SW7.3 SW7.4 SW8.3 SW8.4 SW9.3 SW9.4 SW10.3 SW10.4 SW11.3 SW11.4 SW12.3 SW12.4 U1.2 U1.3 U1.4 U1.14 U1.21 U1.35 U1.37 U2.5 U2.6 U2.12 U2.13 U5.4 U6.9